# Altium PCB 5_Volts_and_3.3_Volts_Power_Supply.PcbDoc
Units mm, origin at the board's own origin, x right, y up, seen from the top; angles counter-clockwise.
Board outline 217.93 x 64.77 mm, 2 copper layers (Top Layer, Bottom Layer), stack 1.271 mm thick; 100 components, 60 nets, 234 pads, 0 vias.
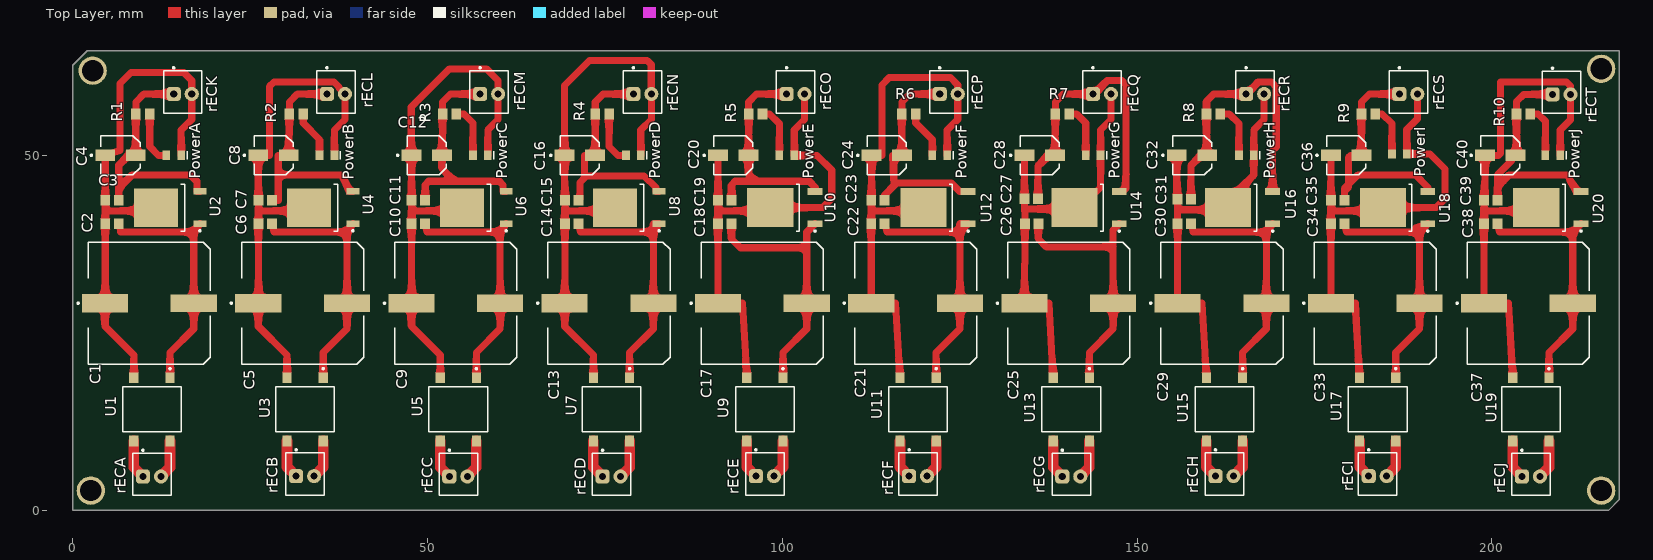
[diagram p0: Top Layer view]
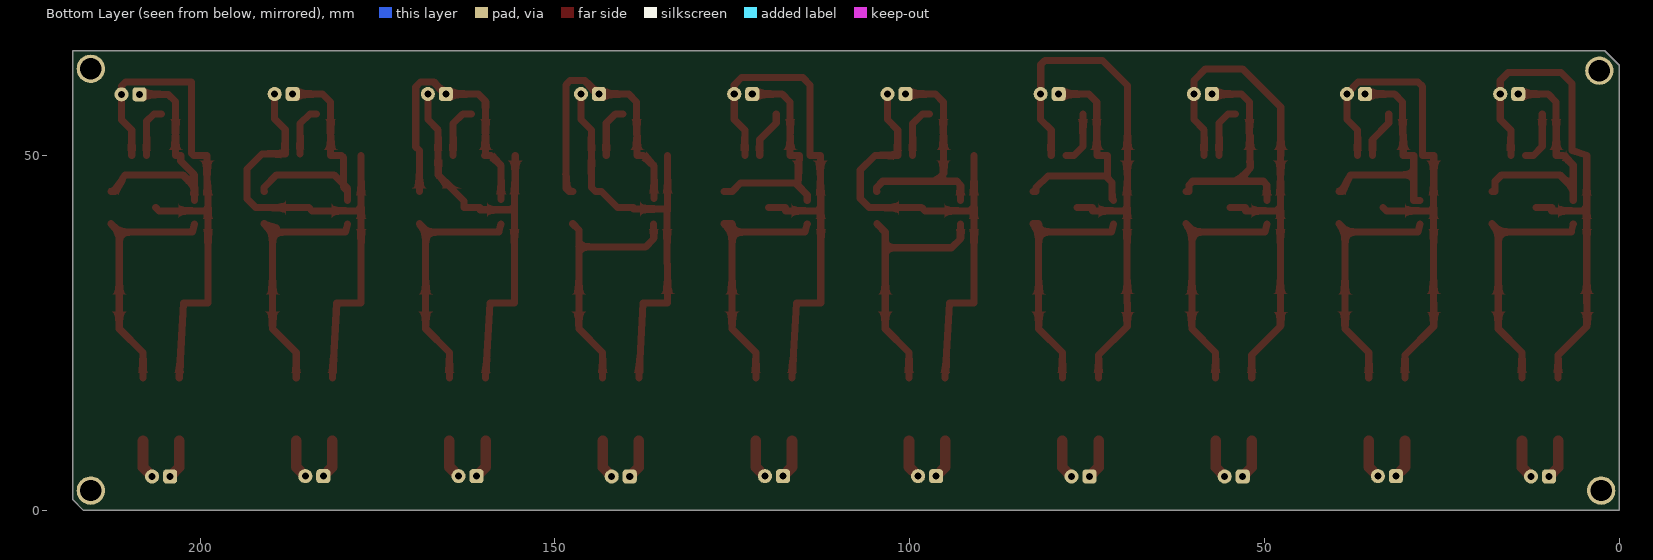
[diagram p1: Bottom Layer view, seen from below]
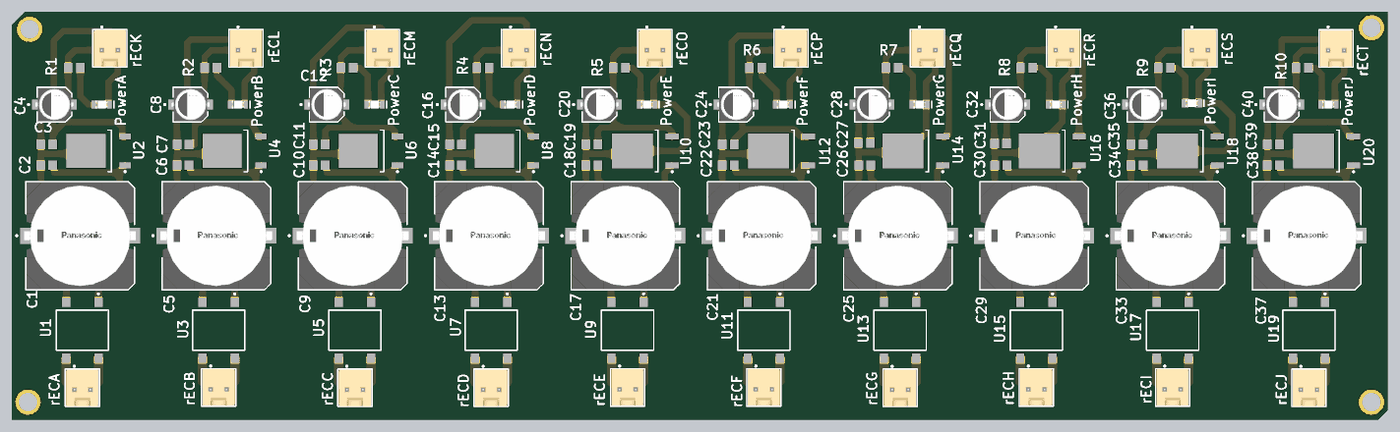
[diagram p2: 3D render of the assembled board from above, using the file's embedded part models]

## Layer stack, top to bottom
Top Solder: solder mask 0.0102, Solder Resist, Dk 3.5
Top Layer: signal copper 0.0356
Dielectric 1: dielectric 1.2, FR-4, Dk 4.8
Bottom Layer: signal copper 0.0356
Bottom Solder: solder mask 0.0102, Solder Resist, Dk 3.5

## Board outline
0,62.738 0,0 216.408,0 217.932,1.524 217.932,64.77 2.032,64.77

## Design rules (kind name [scope] priority, off if disabled: settings)
Clearance [All] p1: gap=0.2 ignorepadtopadclearanceinfootprint=FALSE
PolygonConnect [All] p1: connectstyle=Relief reliefconductorwidth=0.254 reliefentries=4 polygonreliefangle="90 Angle" airgapwidth=0.254
RoutingVias [All] p1: holewidth=1 width=2 viastyle="Through Hole" minholewidth=1 minwidth=2 maxholewidth=1 maxwidth=2
SolderMaskExpansion [All] p1: expansion=0.102 istentingtop=FALSE
Width [All] p1: maxlimit=2 minlimit=0.254 preferedwidth=1
30 further rules are at their usual default settings.

## Components (designator, comment, footprint, x,y, rotation, side; value= is the part's Value field where it differs from the comment)
C1 "EEE-FK1H471AM" FP-FKJ16-MFG 10.796,29.21 r0 top
C2 "GRM219R71H334KA88D" CAPC2013X95X45ML10T25 5.522,40.386 r180 top
C3 "GRM21BR71H104KA01L" CAPC2013X135X45ML10T25 5.522,43.688 r180 top
C4 "EEE-FK1H100UR" FP-FKC-MFG 6.722,50.038 r0 top
C5 "EEE-FK1H471AM" FP-FKJ16-MFG 32.386,29.21 r0 top
C6 "GRM219R71H334KA88D" CAPC2013X95X45ML10T25 27.112,40.386 r180 top
C7 "GRM21BR71H104KA01L" CAPC2013X135X45ML10T25 27.112,43.688 r180 top
C8 "EEE-FK1H100UR" FP-FKC-MFG 28.286,50.038 r0 top
C9 "EEE-FK1H471AM" FP-FKJ16-MFG 53.976,29.21 r0 top
C10 "GRM219R71H334KA88D" CAPC2013X95X45ML10T25 48.702,40.386 r180 top
C11 "GRM21BR71H104KA01L" CAPC2013X135X45ML10T25 48.702,43.688 r180 top
C12 "EEE-FK1H100UR" FP-FKC-MFG 49.876,50.038 r0 top
C13 "EEE-FK1H471AM" FP-FKJ16-MFG 75.566,29.21 r0 top
C14 "GRM219R71H334KA88D" CAPC2013X95X45ML10T25 70.292,40.386 r180 top
C15 "GRM21BR71H104KA01L" CAPC2013X135X45ML10T25 70.292,43.688 r180 top
C16 "EEE-FK1H100UR" FP-FKC-MFG 71.466,50.038 r0 top
C17 "EEE-FK1H471AM" FP-FKJ16-MFG 97.182,29.21 r0 top
C18 "GRM219R71H334KA88D" CAPC2013X95X45ML10T25 91.882,40.386 r180 top
C19 "GRM21BR71H104KA01L" CAPC2013X135X45ML10T25 91.882,43.688 r180 top
C20 "EEE-FK1H100UR" FP-FKC-MFG 93.082,50.038 r0 top
C21 "EEE-FK1H471AM" FP-FKJ16-MFG 118.772,29.21 r0 top
C22 "GRM219R71H334KA88D" CAPC2013X95X45ML10T25 113.472,40.386 r180 top
C23 "GRM21BR71H104KA01L" CAPC2013X135X45ML10T25 113.472,43.688 r180 top
C24 "EEE-FK1H100UR" FP-FKC-MFG 114.731,50.038 r0 top
C25 "EEE-FK1H471AM" FP-FKJ16-MFG 140.362,29.21 r0 top
C26 "GRM219R71H334KA88D" CAPC2013X95X45ML10T25 135.128,40.386 r180 top
C27 "GRM21BR71H104KA01L" CAPC2013X135X45ML10T25 135.062,43.942 r180 top
C28 "EEE-FK1H100UR" FP-FKC-MFG 136.262,50.038 r0 top
C29 "EEE-FK1H471AM" FP-FKJ16-MFG 161.952,29.21 r0 top
C30 "GRM219R71H334KA88D" CAPC2013X95X45ML10T25 156.652,40.386 r180 top
C31 "GRM21BR71H104KA01L" CAPC2013X135X45ML10T25 156.627,43.84 r180 top
C32 "EEE-FK1H100UR" FP-FKC-MFG 157.734,50.038 r0 top
C33 "EEE-FK1H471AM" FP-FKJ16-MFG 183.542,29.21 r0 top
C34 "GRM219R71H334KA88D" CAPC2013X95X45ML10T25 178.242,40.386 r180 top
C35 "GRM21BR71H104KA01L" CAPC2013X135X45ML10T25 178.242,43.688 r180 top
C36 "EEE-FK1H100UR" FP-FKC-MFG 179.442,50.038 r0 top
C37 "EEE-FK1H471AM" FP-FKJ16-MFG 205.132,29.21 r0 top
C38 "GRM219R71H334KA88D" CAPC2013X95X45ML10T25 199.832,40.386 r180 top
C39 "GRM21BR71H104KA01L" CAPC2013X135X45ML10T25 199.832,43.688 r180 top
C40 "EEE-FK1H100UR" FP-FKC-MFG 201.168,50.038 r0 top
PowerA "150080GS75000" WL-SMCW_0805_150080xx75000 14.224,50.038 r180 top
PowerB "150080GS75000" WL-SMCW_0805_150080xx75000 35.814,50.038 r180 top
PowerC "150080GS75000" WL-SMCW_0805_150080xx75000 57.438,50.038 r180 top
PowerD "150080GS75000" WL-SMCW_0805_150080xx75000 78.994,50.038 r180 top
PowerE "150080GS75000" WL-SMCW_0805_150080xx75000 100.618,50.038 r180 top
PowerF "150080GS75000" WL-SMCW_0805_150080xx75000 122.174,50.038 r180 top
PowerG "150080GS75000" WL-SMCW_0805_150080xx75000 143.798,50.038 r180 top
PowerH "150080GS75000" WL-SMCW_0805_150080xx75000 165.388,50.038 r180 top
PowerI "150080GS75000" WL-SMCW_0805_150080xx75000 186.944,50.241 r180 top
PowerJ "150080GS75000" WL-SMCW_0805_150080xx75000 208.568,50.038 r180 top
R1 "ERJ-6ENF1001V" RESC2013X70X40ML20T20 9.865,55.88 r0 top
R2 "ERJ-6ENF1001V" RESC2013X70X40ML20T20 31.496,55.88 r0 top
R3 "ERJ-6ENF1001V" RESC2013X70X40ML20T20 53.086,55.88 r0 top
R4 "ERJ-6ENF1001V" RESC2013X70X40ML20T20 74.609,55.88 r0 top
R5 "ERJ-6ENF1001V" RESC2013X70X40ML20T20 96.225,55.88 r0 top
R6 "ERJ-6ENF1001V" RESC2013X70X40ML20T20 117.815,55.88 r0 top
R7 "ERJ-6ENF1001V" RESC2013X70X40ML20T20 139.446,55.88 r0 top
R8 "ERJ-6ENF1001V" RESC2013X70X40ML20T20 160.741,55.88 r0 top
R9 "ERJ-6ENF1001V" RESC2013X70X40ML20T20 182.585,55.88 r0 top
R10 "ERJ-6ENF1001V" RESC2013X70X40ML20T20 204.429,55.88 r0 top
rECA "61900211121" 61900211121 11.15,5.08 r180 top
rECB "61900211121" 61900211121 32.74,5.126 r180 top
rECC "61900211121" 61900211121 54.33,5.08 r180 top
rECD "61900211121" 61900211121 75.92,5.08 r180 top
rECE "61900211121" 61900211121 97.536,5.126 r180 top
rECF "61900211121" 61900211121 119.126,5.126 r180 top
rECG "61900211121" 61900211121 140.716,5.08 r180 top
rECH "61900211121" 61900211121 162.306,5.126 r180 top
rECI "61900211121" 61900211121 183.896,5.126 r180 top
rECJ "61900211121" 61900211121 205.486,5.08 r180 top
rECK "61900211121" 61900211121 15.494,58.974 r180 top
rECL "61900211121" 61900211121 37.084,58.974 r180 top
rECM "61900211121" 61900211121 58.674,58.974 r180 top
rECN "61900211121" 61900211121 80.264,58.974 r180 top
rECO "61900211121" 61900211121 101.854,58.974 r180 top
rECP "61900211121" 61900211121 123.444,58.974 r180 top
rECQ "61900211121" 61900211121 145.034,58.974 r180 top
rECR "61900211121" 61900211121 166.624,58.974 r180 top
rECS "61900211121" 61900211121 188.214,58.974 r180 top
rECT "61900211121" 61900211121 209.804,58.928 r180 top
U1 "DF10S" FAIR-SDIP-4_V 11.15,14.224 r180 top
U2 "L78M05CDT-TR" TO-252_L 13.716,42.672 r180 top
U3 "DF10S" FAIR-SDIP-4_V 32.74,14.224 r180 top
U4 "L78M05CDT-TR" TO-252_L 35.274,42.672 r180 top
U5 "DF10S" FAIR-SDIP-4_V 54.33,14.224 r180 top
U6 "L78M05CDT-TR" TO-252_L 56.87,42.672 r180 top
U7 "DF10S" FAIR-SDIP-4_V 75.92,14.224 r180 top
U8 "L78M05CDT-TR" TO-252_L 78.428,42.672 r180 top
U9 "DF10S" FAIR-SDIP-4_V 97.536,14.224 r180 top
U10 "LF33ABDT-TR" TO-252_N 100.348,42.672 r180 top
U11 "DF10S" FAIR-SDIP-4_V 119.126,14.224 r180 top
U12 "LF33ABDT-TR" TO-252_N 121.92,42.672 r180 top
U13 "DF10S" FAIR-SDIP-4_V 140.716,14.224 r180 top
U14 "LF33ABDT-TR" TO-252_N 143.224,42.672 r180 top
U15 "DF10S" FAIR-SDIP-4_V 162.306,14.224 r180 top
U16 "LF33ABDT-TR" TO-252_N 164.846,42.672 r180 top
U17 "DF10S" FAIR-SDIP-4_V 183.896,14.224 r180 top
U18 "LF33ABDT-TR" TO-252_N 186.708,42.672 r180 top
U19 "DF10S" FAIR-SDIP-4_V 205.486,14.224 r180 top
U20 "LF33ABDT-TR" TO-252_N 208.298,42.672 r180 top

## Footprints (in the part's own frame and the unit in brackets; to place one, negate y for a bottom-side part, rotate by r counter-clockwise, add the part's x,y. Pads: shape width x height; smd on the part's side, far side on the other; paste and mask are expansions set on the pad)
61900211121 [mm] "2.54mm Male Locking Header, 2p"
  rrect50% 2x2 hole 1: 1(1.27,0.3)
  round 2 hole 1: 2(-1.27,0.3)
  silkscreen extent -2.71,-3.52 2.71,2.98, body extent -2.54,-2.9 2.54,2.9, height 11.53
CAPC2013X95X45ML10T25 [mm] "Chip Capacitor, 2-Leads, Body 2.00x1.25mm, IPC Low Density"
  rect 1.4x1.5 smd: 1(-0.95,0) 2(0.95,0)
  body extent -1.05,-0.67 1.05,0.67, height 0.95
CAPC2013X135X45ML10T25 [mm] "Chip Capacitor, 2-Leads, Body 2.10x1.35mm, IPC Low Density"
  rect 1.4x1.5 smd: 1(-0.95,0) 2(0.95,0)
  body extent -1.05,-0.67 1.05,0.67, height 1.35
FAIR-SDIP-4_V [mm] "SMD, 4-Leads, Body 8.28x6.35mm, Pitch 5.1mm"
  rect 1.3x1.5 smd: 1(-2.55,-4.45) 2(2.55,-4.45) 3(2.55,4.45) 4(-2.55,4.45)
  silkscreen extent -4.14,-5.87 4.14,3.18, body extent -4.14,-3.18 4.14,3.18, height 2.84
FP-FKC-MFG [mm]
  rect 2.8x1.6 smd paste+0 mask+0: 1(-2.15,0) 2(2.15,0)
  silkscreen extent -4.22,-2.75 2.75,2.75, body extent -3.8,-3 3.8,3, height 0.25
FP-FKJ16-MFG [mm]
  rect 6.5x2.6 smd paste+0 mask+0: 1(-6.25,0)
  rect 6.5x2.5 smd paste+0 mask+0: 2(6.25,0)
  silkscreen extent -10.17,-8.6 8.6,8.6, body extent -9.75,-8.85 9.75,8.85, height 0.25
RESC2013X70X40ML20T20 [mm] "Chip Resistor, 2-Leads, Body 2.00x1.25mm, IPC Low Density"
  rect 1.35x1.55 smd: 1(-0.975,0) 2(0.975,0)
  body extent -1.1,-0.72 1.1,0.72, height 0.7
TO-252_L [mm] "D-PAK, 4-Leads, Body 6.1x6.5mm, Pitch 2.28mm, Lead Span 9.7mm, IPC High Density"
  rect 1.8x0.9 smd: 1(-4.2,2.28) 3(-4.2,-2.28)
  rect 6.2x5.45 smd: 4(2,0)
  silkscreen extent -4.33,-3.3 -1.5,3.4, body extent -2.05,-3.3 4.15,3.3, height 2.4
TO-252_N [mm] "D-PAK, 4-Leads, Body 6.1x6.5mm, Pitch 2.28mm, Lead Span 9.7mm, IPC Medium Density"
  rect 2.1x0.95 smd: 1(-4.25,2.28) 3(-4.25,-2.28)
  rect 6.5x5.5 smd: 4(2.05,0)
  silkscreen extent -4.38,-3.3 -1.6,3.43, body extent -2,-3.3 4.2,3.3, height 2.4
WL-SMCW_0805_150080xx75000 [mm] "SMD Mono-color Chip LED, body 2.0x1.25mm"
  rect 1.1x1.3 smd: 1(-1.05,0) 2(1.05,0)
  silkscreen extent -2,-0.6 -1.8,0.6, body extent -1,-0.63 1,0.62, height 0.7

## Part data
C1 C5 C9 C13 C17 C21 C25 C29 C33 C37: library part CMP-05427-002167-1, "CAP ALUM 470UF 20% 50V SMD", Capacitance=470uF, Case/Package=Radial, ESR (Equivalent Series Resistance)=73mR, Max Operating Temperature=105°C, Min Operating Temperature=-55°C, Package Quantity=125, Ratings=AEC-Q200, Ripple Current=1.61A, Tolerance=20%, Voltage=50V, Construction=Cylindrical, Diameter=16mm, Dissipation Factor=0.12%, Height=16.5mm, Height - Seated (Max)=0.669inch, Impedance=73mR, Lead Free="Lead Free", Length=16.5mm, Life (Hours)=5000Hour, Mount="Surface Mount", Packaging="Tape and Reel", Polarity=Polar, Radiation Hardening=No, Reach SVHC Compliant=Yes, Ripple Current (AC)=1.61A, RoHS Compliant=Yes, Series=FK, Termination=SMD/SMT, Voltage Rating=50V, Voltage Rating (DC)=50V
C2 C6 C10 C14 C18 C22 C26 C30 C34 C38: library part CMP-1036-04606-2, "Multilayer Ceramic Capacitor, 0.33 uF, 50 V, ï¿½ 10%, X7R, 0805 [2012 Metric]", Manufacturer=Murata, Part Number=GRM219R71H334KA88D
C3 C7 C11 C15 C19 C23 C27 C31 C35 C39: library part CMP-2100-03644-1, "Chip Capacitor, 0.1 uF, +/- 10%, 50 V, -55 to 125 degC, 0805 (2012 Metric), RoHS, Tape and Reel", Capacitance=100nF, Case Code (Imperial)=0805, Case Code (Metric)=2012, Dielectric=X7R, Dielectric Material=Ceramic, Insulation Resistance=10GR, Manufacturer=Murata, Max Operating Temperature=125degC, Min Operating Temperature=-55degC, Package Description="2-Pin Surface Mount Device, Body 2 x 1.25 mm", Package Quantity=1, Tolerance=10%, Voltage=50V, Case/Package=0805, Datasheet URL=http://psearch.en.murata.com/capacitor/product/GRM21BR71H104KA01%23.pdf, Datasheet Version=42675.0, Depth=1.25mm, Height=1.25mm, Lead Free=LeadFree, Length=2mm, Manufacturer URL=http://www.murata.com/, Material=Ceramic, Mount=SurfaceMount, Number of Pins=2, Package Reference=0805, Packaging=TapeandReel, Radiation Hardening=No, REACH SVHC=Unknown, RoHSCompliant=true, Termination=SMD/SMT, Thickness=0.053inch, Voltage Rating=50V, Voltage Rating (DC)=50V, Width=0.049inch
C4 C8 C12 C16 C20 C24 C28 C32 C36 C40: library part CMP-05427-000030-1, "CAP ALUM 10UF 20% 50V SMD", Capacitance=10uF, Case/Package=Radial, Dielectric Material=Aluminium, ESR (Equivalent Series Resistance)=1.52R, Leakage Current=3uA, Max Operating Temperature=105°C, Min Operating Temperature=-55°C, Package Quantity=1000, Ripple Current=85mA, Tolerance=20%, Voltage=50V, Construction=Cylindrical, Contact Plating=Tin, Diameter=5mm, Height=5.8mm, Height - Seated (Max)=0.228inch, Impedance=1.52R, Lead Free="Lead Free", Length=5.8mm, Life (Hours)=2000Hour, Material=Aluminium, Mount="Surface Mount", Number of Pins=2, Packaging="Tape and Reel", Radiation Hardening=No, REACH SVHC="No SVHC", Ripple Current (AC)=85mA, RoHS Compliant=Yes, Series=FK, Termination=SMD/SMT, Voltage Rating=50V, Voltage Rating (DC)=50V, Width=6.5mm
PowerA PowerB PowerC PowerD PowerE PowerF PowerG PowerH PowerI PowerJ: library part CMP-1426-00007-2, "WURTH ELEKTRONIK - 150080GS75000 - LED, Green, SMD, 0805, 30 mA, 3.2 V, 520 nm", Case Code (Imperial)=0805, Case Code (Metric)=2012, Color=Green, Forward Current=100mA, Forward Voltage=3.2V, Max Junction Temperature (Tj)=95°C, Max Operating Temperature=85°C, Max Reverse Voltage (DC)=5V, Min Operating Temperature=-40°C, Power Dissipation=105mW, Test Current=20mA, Case/Package=0805, Dominant Wavelength=525nm, Height=700µm, Length=2mm, Lens Style="Clear, Rectangular", Luminous Intensity=450mcd, Mount="Surface Mount", NexarPartId=29717780, Packaging="Tape and Reel", Peak Wavelength=515nm, REACH SVHC=Unknown, Reverse Voltage=5V, RoHS=Compliant, Viewing Angle=140°, Wavelength=520nm, Width=1.25mm
R1 R2 R3 R4 R5 R6 R7 R8 R9 R10: library part CMP-2001-04375-5, "Chip Resistor, 1 KOhm, +/- 1%, 0.125 W, -55 to 155 degC, 0805 (2012 Metric), RoHS, Tape and Reel", Manufacturer=Panasonic, Max Operating Temperature="155 degC", Min Operating Temperature="-55 degC", Package Quantity=1, Voltage Rating="150 V", ComponentLink1Description="Manufacturer URL", ComponentLink1URL=http://www.panasonic.com/, ComponentLink2Description=Datasheet, ComponentLink2URL=http://industrial.panasonic.com/cdbs/www-data/pdf/RDA0000/AOA0000C86.pdf, DatasheetVersion=04/2015, Height="0.6 mm", Length="2 mm", Mount="Surface Mount", Mounting Technology="Surface Mount", PackageDescription="2-Pin Surface Mount Device, Body 2 x 1.25 mm", PackageReference=0805, Packaging="Cut Tape", REACH SVHC=Yes, RoHSCompliant=true
rECA rECB rECC rECD rECE rECF rECG rECH rECI rECJ rECK rECL rECM rECN rECO rECP rECQ rECR rECS rECT: library part CMP-1502-00584-3, "2 Position 2.54mm Pitch Vertical ThroughHole Non-Shrouded Header", Color=Beige, Contact Resistance=20mΩ, Current Rating=3A, Flammability Rating="UL94 V-0", Insulation Resistance=1GΩ, Max Operating Temperature=105°C, Min Operating Temperature=-40°C, Operating Supply Voltage=250V, Connector Type="Male Pin", Contact Gender=Male, Contact Material=Copper, Contact Mating Length=7.493mm, Contact Plating=Tin, Fastening Type=Friction, Gender=Male, Height=11.75mm, Housing Material=Nylon, Lead Pitch=2.54mm, Length=5.08mm, Mount="Through Hole", NexarPartId=18818218, Number of Contacts=2, Number of Pins=2, Number of Positions=2, Number of Rows=1, Orientation=Vertical, Packaging=Bulk, Pitch=2.54mm, REACH SVHC=Unknown, RoHS=Compliant, Termination="Through Hole", Voltage Rating=250V, Width=5.12mm
U1 U3 U5 U7 U9 U11 U13 U15 U17 U19: library part CMP-2000-06153-1, "Bridge Rectifier, 1.5 A, 1000 V, 4-Pin SDIP, RoHS, Tape and Reel", Manufacturer=FairchildSemiconductor, Operating Temperature=-55to150°C, Package=4SDIPSMD, Package Description="4-Pin Surface Mount Device, Body 8.28 x 6.35 mm, Pitch 5.1 mm", Package Reference="SDIP 4L", Peak Average Forward Current=1.5@Ta=40CA, Peak Forward Voltage=1.1@1AV, Peak Reverse Current=5uA, Peak Reverse Repetitive Voltage=1000V, Bridge Type=SinglePhase, Category=BridgeRectifier, Configuration=Single, Datasheet URL=http://www.farnell.com/datasheets/1941063.pdf, Datasheet Version="Rev. 1.5, 05/2015", Manufacturer URL=https://www.fairchildsemi.com/, Mounting=SurfaceMount, Mounting Technology=SurfaceMount, Packaging=Tape&Reel
U2 U4 U6 U8: library part CMP-0244-00178-1, "Positive Voltage Regulator, 5V, 3-Pin DPAK, Tape and Reel", ComponentLink1Description="Manufacturer URL", ComponentLink1URL=http://www.st.com, ComponentLink2Description=Datasheet, ComponentLink2URL=http://www.st.com/internet/com/TECHNICAL_RESOURCES/TECHNICAL_LITERATURE/DATASHEET/CD00000447.pdf, DatasheetVersion=1/11/2010, PackageDescription="3-Pin Transistor Outline Package 2.28 mm Pitch, 9.7 mm Lead Span (DPAK)", PackageReference=TO-252, PackageVersion=2011
U10 U12 U14 U16 U18 U20: library part CMP-0244-00064-1, "500mA, Very Low Drop (0.45V) Voltage Regulator, 3.3V, 3-Pin DPAK, Tape and Reel", ComponentLink1Description="Manufacturer URL", ComponentLink1URL=http://www.st.com, ComponentLink2Description=Datasheet, ComponentLink2URL=http://www.st.com/internet/com/TECHNICAL_RESOURCES/TECHNICAL_LITERATURE/DATASHEET/CD00000546.pdf, DatasheetVersion=1/11/2010, PackageDescription="3-Pin Transistor Outline Package 2.28 mm Pitch, 9.7 mm Lead Span (DPAK)", PackageReference=TO-252, PackageVersion=2011

## Free pads (board coordinates)
  round 4 hole 3: 18(2.54,2.794) 18(2.794,61.976) 18(215.392,2.794) 18(215.392,62.23)

## Nets (pads, with @x,y where several pads share a name; then routed paths per layer and width w, separated by ;. In a path a pad name is that pad's centre, name@x,y a point inside that pad or via, vN(x,y) a via of type N, cw(c..) or ccw(c..) an arc to the next point about the centre after c; other vN are vias at no path point)
3.3V_Grid: C27.1 C28.2 R7.1 rECQ.1 U14.3 | length 42.3
  Top Layer w1: C27.1 136.012,48.534 137.516,50.038 C28.2 138.412,52.908 138.471,52.967 R7.1 138.471,57.556 139.589,58.674 rECQ.1 144.264,59.174 144.4,59.174 145.788,60.562 147.852,60.562 148.438,59.976 148.438,45.391 147.999,44.952 U14.3
3.3V_Grid_Ref: C35.1 C36.2 R9.1 rECS.1 U18.3 | length 35.9
  Top Layer w1: C35.1 179.192,44.958 ; rECS.1 182.728,58.674 181.61,57.556 R9.1 181.61,52.952 181.592,52.934 C36.2 180.086,50.038 179.807,49.759 179.807,45.999 ; U18.3 191.001,44.952 191.001,45.523 189.23,47.295 181.102,47.295 179.807,45.999 ; 179.192,44.958 179.192,45.385 179.807,45.999 ; 179.192,44.958 179.807,45.573 179.807,45.999
3.3V_Iinv: C31.1 C32.2 R8.1 rECR.1 U16.3 | length 41.5
  Top Layer w1: C31.1 157.577,48.585 159.029,50.038 C32.2@159.766,50.038 ; C32.2 C32.2@159.766,50.038 ; U16.3 169.088,44.952 169.088,50.698 169.596,51.206 169.596,59.69 168.91,60.376 167.056,60.376 rECR.1 160.782,58.674 159.766,57.658 R8.1 C32.2@159.766,50.038
3.3V_Iinv_Ref: C39.1 C40.2 R10.1 rECT.1 U20.3 | length 34.7
  Top Layer w1: C39.1 200.782,45.639 ; rECT.1 204.47,58.628 203.454,57.612 R10.1 203.454,50.038 C40.2 202.717,50.038 202.717,49.23 200.782,47.295 200.782,45.639 ; U20.3 211.963,44.952 210.566,47.295 202.438,47.295 200.782,45.639
3.3V_IPV: C23.1 C24.2 R6.1 rECP.1 U12.3 | length 32.6
  Top Layer w1: C23.1 114.422,44.47 115.763,45.811 ; C24.2 C24.2@116.84,50.038 ; rECP.1 117.958,58.674 116.84,57.556 R6.1 C24.2@116.84,50.038 ; U12.3 124.999,44.952 123.825,46.126 116.078,46.126 115.763,45.811 ; 115.763,45.811 115.524,49.96 115.519,50.038 C24.2@116.84,50.038
3.3V_VPV: C19.1 C20.2 R5.1 rECO.1 U10.3 | length 32.6
  Top Layer w1: C19.1 92.832,45.872 93.34,46.38 96.241,46.38 ; rECO.1 96.368,58.674 95.25,57.556 R5.1 95.25,52.952 95.232,52.934 C20.2 95.225,50.038 95.225,47.396 96.241,46.38 ; U10.3 104.641,44.952 104.641,45.523 103.784,46.38 96.241,46.38
5V_Grid: C11.1 C12.2 R3.1 rECM.1 U6.3 | length 32.7
  Top Layer w1: C11.1 49.652,45.872 50.16,46.38 53.823,46.38 ; rECM.1 53.229,58.674 52.111,57.556 R3.1 52.111,52.993 52.026,52.908 C12.2 52.019,50.038 52.019,48.184 53.823,46.38 ; U6.3 60.63,44.952 60.63,45.847 60.096,46.38 53.823,46.38
5V_Iinv: C15.1 C16.2 R4.1 rECN.1 U8.3 | length 33.4
  Top Layer w1: C15.1 71.442,43.888 71.442,44.49 71.476,44.524 71.476,46.228 72.131,46.883 ; rECN.1 74.752,58.674 73.634,57.556 R4.1 73.634,52.952 73.616,52.934 C16.2 72.131,50.038 72.131,46.883 ; U8.3 82.169,44.952 82.169,45.491 80.518,47.142 72.39,47.142 72.131,46.883
5V_IPV: C7.1 C8.2 R2.1 rECL.1 U4.3 | length 34
  Top Layer w1: C7.1 28.956,43.688 28.956,47.295 ; rECL.1 31.639,58.674 30.521,57.556 R2.1 30.521,52.993 30.436,52.908 C8.2 28.956,50.038 28.956,47.295 ; U4.3 39.014,44.952 37.846,47.295 28.956,47.295
5V_VPV: C3.1 C4.2 R1.1 rECK.1 U2.3 | length 35.3
  Top Layer w1: C3.1 6.472,45.385 ; rECK.1 10.008,58.674 8.89,57.556 R1.1 8.89,52.952 8.872,52.934 C4.2 7.844,50.038 6.472,48.666 6.472,45.385 ; U2.3 17.475,44.952 17.475,46.38 16.561,47.295 8.382,47.295 6.472,45.385
DC_IPV: C5.1 C6.2 C7.2 C8.1 PowerB.1 rECL.2 U3.2 U4.4 | length 72.8
  Top Layer w1: U3.2 30.19,21.895 26.136,25.949 C5.1 26.162,29.21 C6.2 26.162,42.723 ; U4.4 32.817,42.215 26.67,42.215 26.162,42.723 ; PowerB.1 36.864,53.594 38.354,55.084 rECL.2 37.516,59.512 37.516,59.69 36.83,60.376 28.346,60.376 27.737,59.766 27.737,50.038 C8.1 26.136,46.889 C7.2 26.162,42.723
DC_VPV: C1.1 C2.2 C3.2 C4.1 PowerA.1 rECK.2 U1.2 U2.4 | length 75
  Top Layer w1: U1.2 8.6,21.895 4.546,25.949 C1.1 4.572,29.21 C2.2 4.572,42.824 ; U2.4 9.5,42.672 9.5,42.215 5.182,42.215 4.572,42.824 ; PowerA.1 15.274,53.594 16.764,55.084 rECK.2 16.764,60.604 15.646,61.722 8.179,61.722 6.629,60.173 6.629,50.724 C4.1 C3.2 4.572,42.824
GND_Grid: C25.1 C26.2 C27.2 C28.1 PowerG.1 rECQ.2 U13.2 U14.4 | length 60.9
  Top Layer w1: C28.1 C27.2 134.112,42.723 ; U13.2 137.556,29.21 C25.1 134.112,34.747 134.178,34.813 C26.2 134.178,42.113 134.112,42.179 134.112,42.723 ; rECQ.2 146.304,55.075 144.848,53.619 144.848,45.508 144.262,44.922 143.424,44.922 U14.4 138.913,42.672 138.913,42.469 134.366,42.469 134.112,42.723
GND_Grid_Ref: C33.1 C34.2 C35.2 C36.1 PowerI.1 rECS.2 U17.2 U18.4 | length 71.4
  Top Layer w1: C36.1 C35.2 177.292,42.824 ; U17.2 180.736,29.21 C33.1 C34.2 177.292,42.824 ; rECS.2 189.484,55.186 187.994,53.696 PowerI.1 191.262,50.241 193.396,48.108 193.396,43.917 192.151,42.672 U18.4 184.201,42.215 177.902,42.215 177.292,42.824
GND_Iinv: C29.1 C30.2 C31.2 C32.1 PowerH.1 rECR.2 U15.2 U16.4 | length 60.6
  Top Layer w1: C32.1 155.584,47.032 C31.2 155.677,42.901 ; U15.2 159.146,29.21 C29.1 C30.2 155.702,42.088 155.677,42.113 155.677,42.901 ; rECR.2 167.894,55.075 166.438,53.619 PowerH.1 166.438,47.254 162.796,43.612 U16.4 160.528,42.672 160.528,42.367 156.21,42.367 155.677,42.901
GND_Iinv_Ref: C37.1 C38.2 C39.2 C40.1 PowerJ.1 rECT.2 U19.2 U20.4 | length 75.4
  Top Layer w1: U19.2 202.326,29.21 C37.1 C38.2 198.882,42.723 ; U20.4 205.791,42.215 199.39,42.215 198.882,42.723 ; PowerJ.1 209.618,53.594 211.074,55.05 rECT.2 211.074,59.792 210.515,60.35 201.244,60.35 201.193,60.3 201.193,50.317 200.914,50.038 C40.1 199.018,46.999 C39.2 198.882,42.723
GND_IPV: C21.1 C22.2 C23.2 C24.1 PowerF.1 rECP.2 U11.2 U12.4 | length 76.3
  Top Layer w1: U11.2 115.966,29.21 C21.1 C22.2 112.522,42.723 ; U12.4 117.475,42.672 117.475,42.215 113.03,42.215 112.522,42.723 ; PowerF.1 123.224,53.594 124.714,55.084 rECP.2 124.714,59.944 123.673,60.985 115.062,60.985 114.046,59.969 114.046,50.038 C24.1 112.581,46.922 C23.2 112.522,42.723
GND_VPV: C17.1 C18.2 C19.2 C20.1 PowerE.1 rECO.2 U9.2 U10.4 | length 71.2
  Top Layer w1: C20.1 C19.2 90.932,42.824 ; U9.2 94.376,29.21 C17.1 C18.2 90.932,42.824 ; rECO.2 103.124,55.075 101.668,53.619 PowerE.1 104.902,50.038 106.959,47.981 106.959,43.942 105.689,42.672 U10.4 97.841,42.215 91.542,42.215 90.932,42.824
NetC1_2: C1.2 C2.1 U1.1 U2.1 | length 36.4
  Top Layer w1: C2.1 6.751,39.243 17.046,39.243 ; U1.1 13.7,22.25 17.046,25.596 C1.2 17.046,39.243 ; 17.046,39.243 17.046,39.522 U2.1 17.046,39.243
NetC5_2: C5.2 C6.1 U3.1 U4.1 | length 36.3
  Top Layer w1: C6.1 28.341,39.243 38.636,39.243 ; U3.1 35.29,22.25 38.636,25.596 C5.2 38.636,39.243 ; 38.636,39.243 38.636,39.554 U4.1 38.636,39.243
NetC9_2: C9.2 C10.1 U5.1 U6.1 | length 36.4
  Top Layer w1: C10.1 49.931,39.243 60.226,39.243 ; U5.1 56.88,22.25 60.226,25.596 C9.2 60.226,39.243 ; 60.226,39.243 60.226,39.548 U6.1 60.226,39.243
NetC13_2: C13.2 C14.1 U7.1 U8.1 | length 36.8
  Top Layer w1: C14.1 71.521,39.243 81.816,39.243 ; U7.1 78.47,22.25 81.816,25.596 C13.2 81.816,39.243 ; 81.816,39.243 81.816,40.392 U8.1 81.816,39.243
NetC17_2: C17.2 C18.1 U9.1 U10.1 | length 36.8
  Top Layer w1: C18.1 92.832,38.252 94.077,37.008 103.432,37.008 ; U9.1 100.086,22.25 103.432,25.596 C17.2 103.432,37.008 ; U10.1 103.432,39.226 103.432,37.008
NetC21_2: C21.2 C22.1 U11.1 U12.1 | length 37.4
  Top Layer w1: C22.1 114.727,39.218 125.022,39.218 ; U11.1 121.676,22.25 125.022,25.596 C21.2 125.022,39.218 ; 125.022,39.218 125.022,40.392 U12.1 125.022,39.218
NetC25_2: C25.2 C26.1 U13.1 U14.1 | length 36.6
  Top Layer w1: C26.1 136.078,38.252 137.196,37.135 146.612,37.135 ; U13.1 143.266,22.25 146.612,25.596 C25.2 146.612,37.135 ; U14.1 146.612,39.53 146.612,37.135
NetC29_2: C29.2 C30.1 U15.1 U16.1 | length 36.5
  Top Layer w1: C30.1 157.907,39.218 168.202,39.218 ; U15.1 164.856,22.25 168.202,25.596 C29.2 168.202,39.218 ; 168.202,39.218 168.202,39.498 U16.1 168.202,39.218
NetC33_2: C33.2 C34.1 U17.1 U18.1 | length 37.8
  Top Layer w1: C34.1 179.497,39.218 189.792,39.218 ; U17.1 186.446,22.25 189.792,25.596 C33.2 189.792,39.218 ; 189.792,39.218 189.792,39.226 189.21,39.808 U18.1 189.792,39.218
NetC37_2: C37.2 C38.1 U19.1 U20.1 | length 36.7
  Top Layer w1: C38.1 201.087,39.218 211.382,39.218 ; U19.1 208.036,22.25 211.382,25.596 C37.2 211.382,39.218 ; 211.382,39.218 211.382,39.226 U20.1 211.382,39.218
NetPowerA_2: PowerA.2 R1.2 | length 7.4
  Top Layer w1: R1.2 10.84,51.283 12.085,50.038 PowerA.2
NetPowerB_2: PowerB.2 R2.2 | length 6.8
  Top Layer w1: R2.2 32.471,54.585 34.764,52.292 PowerB.2
NetPowerC_2: PowerC.2 R3.2 | length 7.4
  Top Layer w1: R3.2 55.118,55.88 56.388,54.61 PowerC.2
NetPowerD_2: PowerD.2 R4.2 | length 7.5
  Top Layer w1: R4.2 75.584,51.283 76.829,50.038 PowerD.2
NetPowerE_2: PowerE.2 R5.2 | length 7.4
  Top Layer w1: R5.2 98.196,55.88 99.568,54.508 PowerE.2
NetPowerF_2: PowerF.2 R6.2 | length 6.8
  Top Layer w1: R6.2 118.79,54.585 121.124,52.251 PowerF.2
NetPowerG_2: PowerG.2 R7.2 | length 7.4
  Top Layer w1: R7.2 141.478,55.88 142.748,54.61 PowerG.2
NetPowerH_2: PowerH.2 R8.2 | length 7.7
  Top Layer w1: R8.2 162.966,55.88 164.338,54.508 PowerH.2
NetPowerI_2: PowerI.2 R9.2 | length 7.2
  Top Layer w1: R9.2 184.522,55.88 185.894,54.508 PowerI.2
NetPowerJ_2: PowerJ.2 R10.2 | length 7.4
  Top Layer w1: R10.2 206.502,55.88 207.518,54.864 PowerJ.2
rECA_N: rECA.2 U1.4 | length 5.5
  Top Layer w1.5: rECA.2 13.7,6.06 U1.4
rECA_P: rECA.1 U1.3 | length 5.5
  Top Layer w1.5: U1.3 8.6,6.06 rECA.1
rECB_N: rECB.2 U3.4 | length 5.5
  Top Layer w1.5: rECB.2 35.29,6.106 U3.4
rECB_P: rECB.1 U3.3 | length 5.5
  Top Layer w1.5: U3.3 30.19,6.106 rECB.1
rECC_N: rECC.2 U5.4 | length 5.5
  Top Layer w1.5: rECC.2 56.88,6.06 U5.4
rECC_P: rECC.1 U5.3 | length 5.5
  Top Layer w1.5: U5.3 51.78,6.06 rECC.1
rECD_N: rECD.2 U7.4 | length 5.5
  Top Layer w1.5: rECD.2 78.47,6.06 U7.4
rECD_P: rECD.1 U7.3 | length 5.5
  Top Layer w1.5: U7.3 73.37,6.06 rECD.1
rECE_N: rECE.2 U9.4 | length 5.5
  Top Layer w1.5: rECE.2 100.086,6.106 U9.4
rECE_P: rECE.1 U9.3 | length 5.5
  Top Layer w1.5: U9.3 94.986,6.106 rECE.1
rECF_N: rECF.2 U11.4 | length 5.5
  Top Layer w1.5: rECF.2 121.676,6.106 U11.4
rECF_P: rECF.1 U11.3 | length 5.5
  Top Layer w1.5: U11.3 116.576,6.106 rECF.1
rECG_N: rECG.2 U13.4 | length 5.5
  Top Layer w1.5: rECG.2 143.266,6.06 U13.4
rECG_P: rECG.1 U13.3 | length 5.5
  Top Layer w1.5: U13.3 138.166,6.06 rECG.1
rECH_N: rECH.2 U15.4 | length 5.5
  Top Layer w1.5: rECH.2 164.856,6.106 U15.4
rECH_P: rECH.1 U15.3 | length 5.5
  Top Layer w1.5: U15.3 159.756,6.106 rECH.1
rECI_N: rECI.2 U17.4 | length 5.5
  Top Layer w1.5: rECI.2 186.446,6.106 U17.4
rECI_P: rECI.1 U17.3 | length 5.5
  Top Layer w1.5: U17.3 181.346,6.106 rECI.1
rECJ_N: rECJ.2 U19.4 | length 5.5
  Top Layer w1.5: rECJ.2 208.036,6.06 U19.4
rECJ_P: rECJ.1 U19.3 | length 5.5
  Top Layer w1.5: U19.3 202.936,6.06 rECJ.1
U_G: C13.1 C14.2 C15.2 C16.1 PowerD.1 rECN.2 U7.2 U8.4 | length 78
  Top Layer w1: U7.2 73.37,21.895 69.316,25.949 C13.1 69.342,29.21 C14.2 69.342,42.723 ; U8.4 74.244,42.672 74.244,42.215 69.85,42.215 69.342,42.723 ; PowerD.1 80.044,53.594 81.534,55.084 rECN.2 81.534,62.813 80.948,63.398 72.822,63.398 69.291,59.868 69.291,50.038 C16.1 69.316,46.889 C15.2 69.342,42.723
V_G: C9.1 C10.2 C11.2 C12.1 PowerC.1 rECM.2 U5.2 U6.4 | length 74
  Top Layer w1: U5.2 51.78,21.895 47.726,25.949 C9.1 47.752,29.21 C10.2 47.752,42.824 ; U6.4 52.654,42.672 52.654,42.215 48.362,42.215 47.752,42.824 ; PowerC.1 58.488,53.619 59.944,55.075 rECM.2 59.944,60.604 58.318,62.23 53.086,62.23 47.701,56.845 47.701,50.038 C12.1 47.726,46.889 C11.2 47.752,42.824